# Altium PCB project_8.PcbDoc
Units mm, origin at the board's own origin, x right, y up, seen from the top; angles counter-clockwise.
Board outline 27.56 x 37.34 mm, 2 copper layers (Top Layer, Bottom Layer); 29 components, 48 nets, 125 pads, 32 vias.
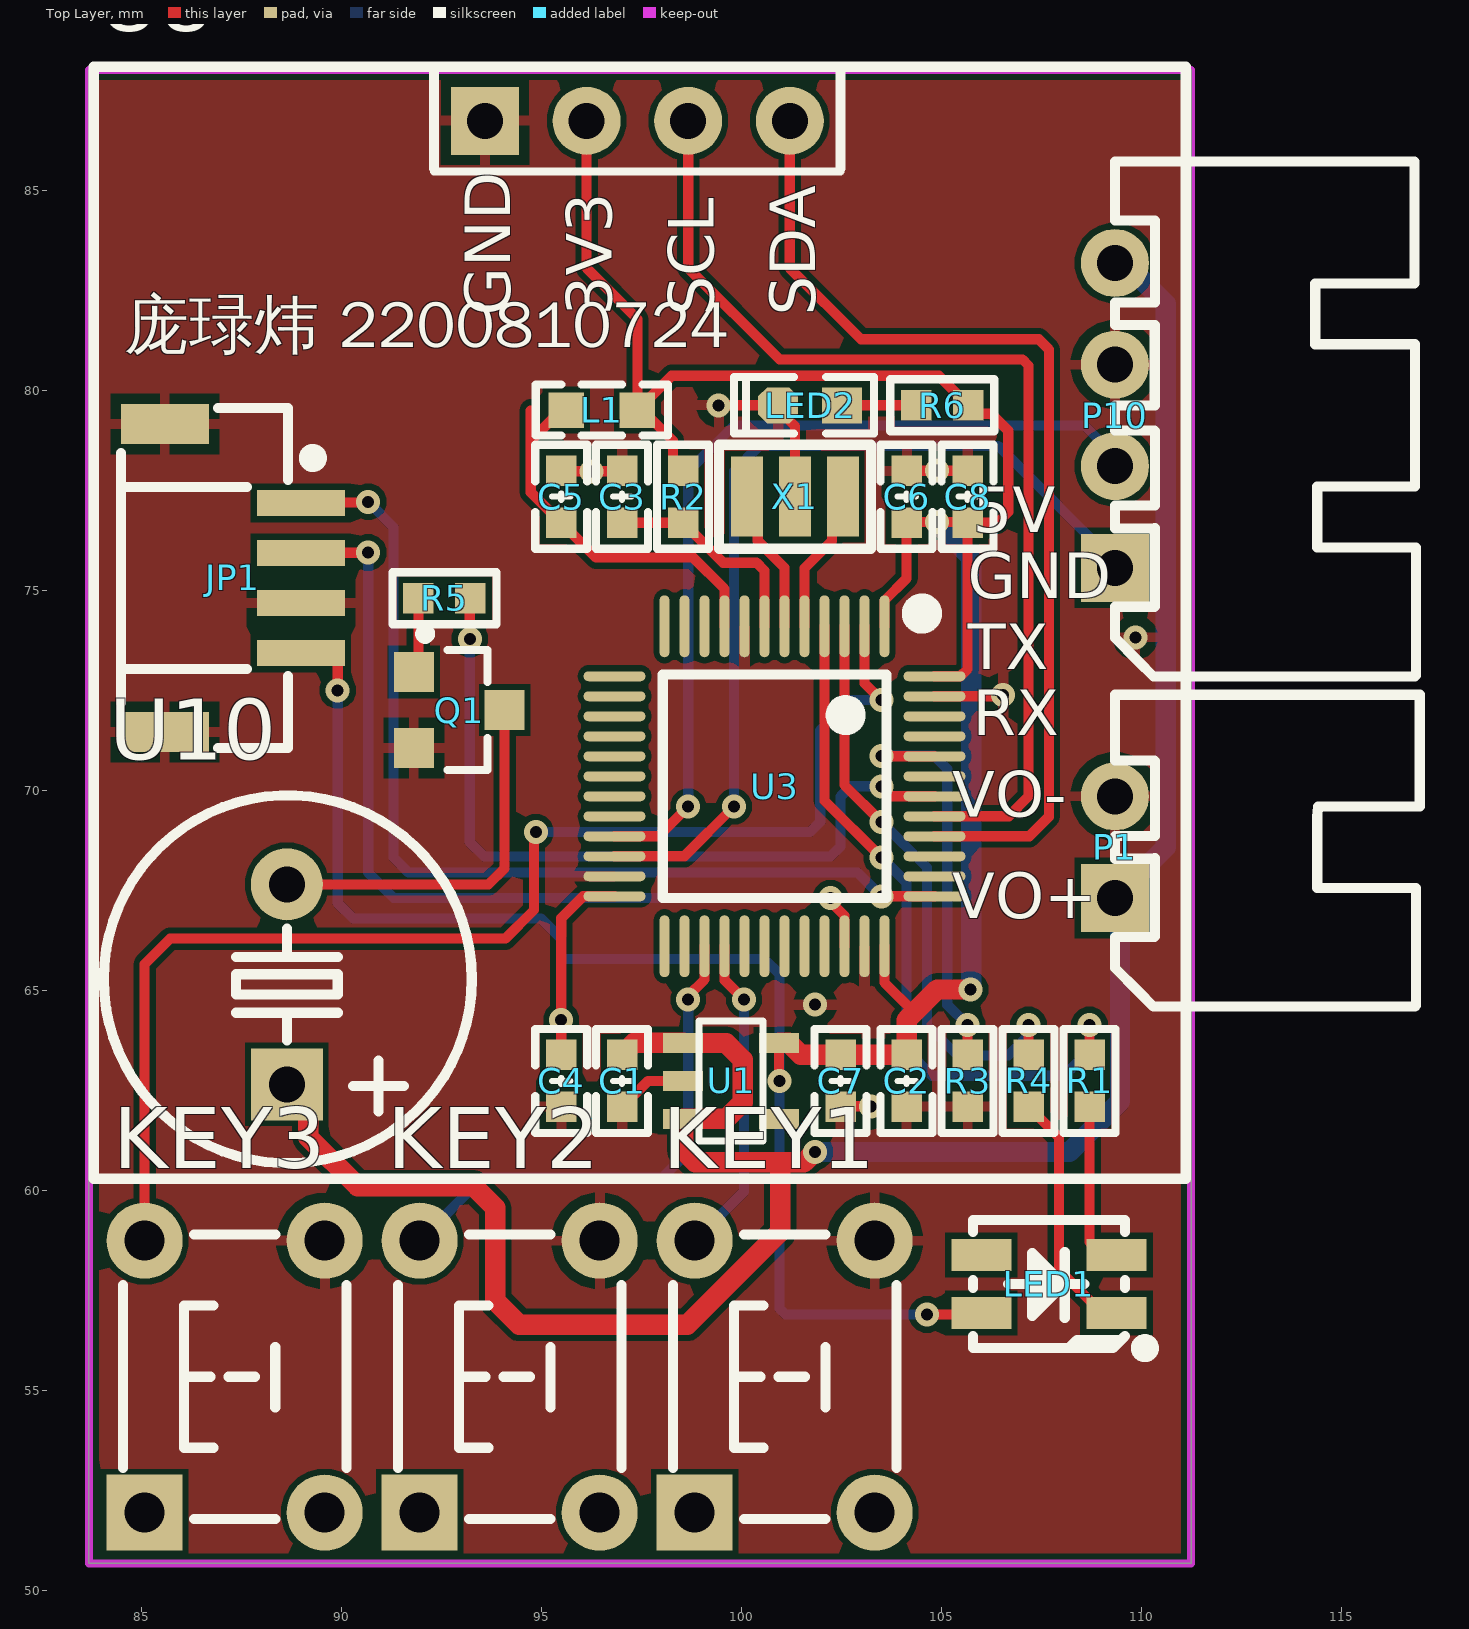
[diagram p0: Top Layer view]
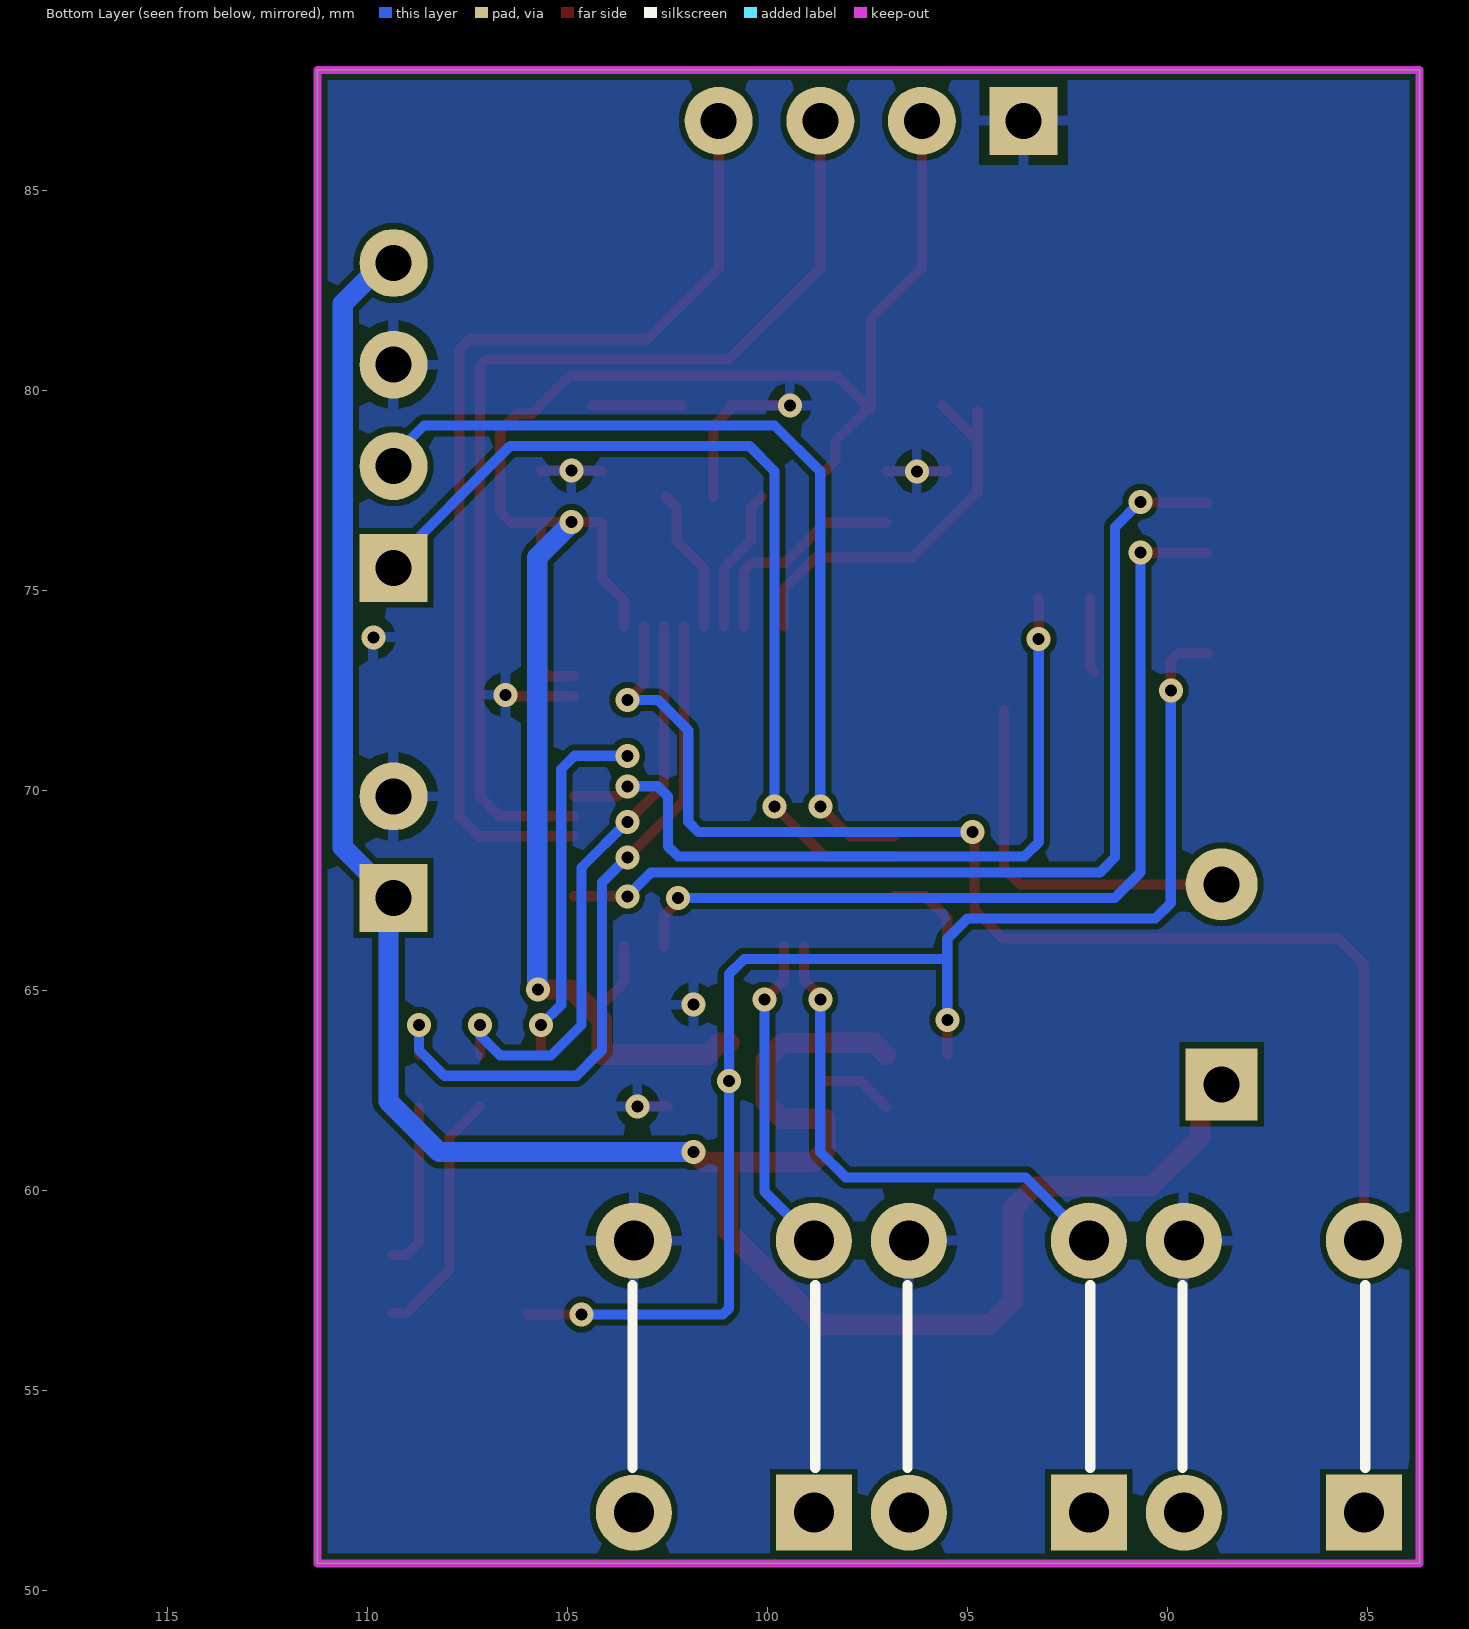
[diagram p1: Bottom Layer view, seen from below]

## Layer stack, top to bottom
Top Solder: solder mask 0.0102, Solder Resist, Dk 3.5
Top Layer: signal copper 0.0356
Dielectric 1: dielectric 0.32, FR-4, Dk 4.8
Bottom Layer: signal copper 0.0356
Bottom Solder: solder mask 0.0102, Solder Resist, Dk 3.5

## Board outline
83.693,50.673 83.693,88.011 111.252,88.011 111.252,50.673

## Design rules (kind name [scope] priority, off if disabled: settings)
Clearance [All] p1: gap=0.152 ignorepadtopadclearanceinfootprint=TRUE
ComponentClearance [All] p1: gap=0.1 collisioncheckmode=3 verticalgap=0 showdistances=FALSE
PolygonConnect [All] p1: connectstyle=Relief reliefconductorwidth=0.254 reliefentries=4 polygonreliefangle="90 Angle" airgapwidth=0.254
RoutingVias [All] p1: holewidth=0.711 width=1.27 viastyle="Through Hole" minholewidth=0.711 minwidth=1.27 maxholewidth=0.711 maxwidth=1.27
SolderMaskExpansion [All] p1: expansion=0.102 istentingtop=FALSE
SupplyNets "Schematic Supply Nets_3" [InNet('5V')] p1: voltage=0.000
SupplyNets "Schematic Supply Nets_2" [InNet('3V3VDDA')] p2: voltage=0.000
SupplyNets "Schematic Supply Nets_1" [InNet('VSS')] p3: voltage=0.000
SupplyNets "Schematic Supply Nets" [InNet('3V3')] p4: voltage=0.000
Width [All] p1: maxlimit=0.508 minlimit=0.254 preferedwidth=0.508 minimp=50.000000 maximp=50.000000 favimp=50.000000
29 further rules are at their usual default settings.

## Components (designator, comment, footprint, x,y, rotation, side; value= is the part's Value field where it differs from the comment)
C1 "1uF" "C 0603_L" 97.028,62.738 r270 top
C2 "100nF" "C 0603_L" 104.14,62.738 r270 top
C3 "100nF/50V" "C 0603_L" 97.028,77.343 r90 top
C4 "100nF/50V" "C 0603_L" 95.504,62.738 r90 top
C5 "100nF/50V" "C 0603_L" 95.504,77.343 r270 top
C6 "100nF/50V" "C 0603_L" 104.14,77.343 r270 top
C7 "100nF/50V" "C 0603_L" 102.489,62.738 r90 top
C8 "100nF/50V" "C 0603_L" 105.664,77.343 r270 top
JP1 "HDR-1X4" "GH 1.25-WS-4P" 86.995,75.311 r270 top
KEY1 "mod_buttom" MOD_BUTTOM 101.092,55.089 r90 top
KEY2 "mod_buttom" MOD_BUTTOM 94.216,55.089 r90 top
KEY3 "mod_buttom" MOD_BUTTOM 87.34,55.089 r90 top
L1 "0Ω" "L 0603" 96.52,79.51 r0 top
LED1 "RGB" "LED 3528-RGB" 107.696,57.658 r180 top
LED2 "Colour" "LED 0603R" 101.727,79.629 r180 top
P1 "port_mot_2p" XH2.54_2P 112.522,68.707 r270 top
P10 "port_uart_4p" XH2.54_4P 113.284,79.248 r270 top
Q1 "SS8050" SOT23-3L 92.964,72.009 r270 top
R1 "1K" "R 0603_L" 108.712,62.738 r270 top
R2 "10k" "R 0603_L" 98.552,77.343 r90 top
R3 "10k" "R 0603_L" 105.664,62.738 r270 top
R4 "1K" "R 0603_L" 107.188,62.738 r270 top
R5 "1K" "R 0603_L" 92.583,74.803 r180 top
R6 "1K" "R 0603_L" 105.029,79.629 r0 top
U1 "RT9013-33GB" SOT23-5 98.552,63.688 r270 top
U3 "STM32F103C8T6" "LQFP48 7X7_L" 100.838,70.104 r180 top locked
U8 "mod_oled" MOD_OLED 97.534,86.694 r0 top
U10 "mod_buzzer" MOD_BUZZER 88.773,65.278 r270 top
X1 "8M" "OSC 3213-3P" 101.346,77.343 r0 top

## Footprints (in the part's own frame and the unit in brackets; to place one, negate y for a bottom-side part, rotate by r counter-clockwise, add the part's x,y. Pads: shape width x height; smd on the part's side, far side on the other; paste and mask are expansions set on the pad)
"C 0603_L" [mil] "无极性贴片电容"
  rect 30x30 smd: 1(-25.59,0) 2(25.59,0)
  silkscreen extent -51,-26 51,26, body extent -31,-16 31,16, height 32
"GH 1.25-WS-4P" [mm] "长：8.25mm，宽：4.8mm，高：4.35mm"
  rect 1x2.2 smd: 0(-3.85,-1.4) 100(3.85,-1.4)
  rect 0.65x2.2 smd: 1(-1.875,2) 2(-0.625,2) 3(0.625,2) 4(1.875,2)
  silkscreen extent -4.25,-2.5 4.25,2.4, body extent -4.13,-2.5 4.12,2.35, height 4.35
"L 0603" [mil] "小功率贴片电感"
  rect 35x35 smd: 1(-35,0) 2(35,0)
  silkscreen extent -65,-25 65,25, body extent -31,-16 31,16, height 31
"LED 0603R" [mm] "红色0603LED"
  rect 1x0.9 smd: 1(-0.8,0)
  oct 1x0.9 smd: 2(0.8,0)
  silkscreen extent -1.6,-0.7 1.9,0.7, body extent -0.8,-0.4 0.8,0.4, height 0.47
"LED 3528-RGB" [mm] "4脚，3528LED"
  rect 1.5x0.8 smd: 1(1.689,0.725) 2(1.689,-0.725) 3(-1.689,-0.725) 4(-1.689,0.725)
  silkscreen extent -2.5,-1.6 1.9,1.7, body extent -1.75,-1.4 1.75,1.4, height 1.9
"LQFP48 7X7_L" [mm] "48脚，体宽7x7mm，脚距0.5mm"
  oval 0.25x1.55 smd: 1(-2.75,-4) 2(-2.25,-4) 3(-1.75,-4) 4(-1.25,-4) 5(-0.75,-4) 6(-0.25,-4) 7(0.25,-4) 8(0.75,-4) 9(1.25,-4) 10(1.75,-4) 11(2.25,-4) 12(2.75,-4) 25(2.75,4) 26(2.25,4) 27(1.75,4) 28(1.25,4) 29(0.75,4) 30(0.25,4) 31(-0.25,4) 32(-0.75,4) 33(-1.25,4) 34(-1.75,4) 35(-2.25,4) 36(-2.75,4)
  oval 1.55x0.25 smd: 13(4,-2.75) 14(4,-2.25) 15(4,-1.75) 16(4,-1.25) 17(4,-0.75) 18(4,-0.25) 19(4,0.25) 20(4,0.75) 21(4,1.25) 22(4,1.75) 23(4,2.25) 24(4,2.75) 37(-4,2.75) 38(-4,2.25) 39(-4,1.75) 40(-4,1.25) 41(-4,0.75) 42(-4,0.25) 43(-4,-0.25) 44(-4,-0.75) 45(-4,-1.25) 46(-4,-1.75) 47(-4,-2.25) 48(-4,-2.75)
  silkscreen extent -3.93,-4.57 2.79,2.79, body extent -4.5,-4.5 4.5,4.5, height 1.45
MOD_BUTTOM [mm]
  rect 1.9x1.9 hole 1: 1(-3.146,2.25)
  round 1.9 hole 1: 2(-3.146,-2.25) 3(3.654,-2.25) 4(3.654,2.25)
  silkscreen extent -3.3,-2.79 3.81,2.79, body extent -3.85,-3 4.36,3, height 4.25
MOD_BUZZER [mm] "有源蜂鸣器"
  rect 1.8x1.8 hole 0.9: 1(2.627,-0.127)
  round 1.8 hole 0.9: 2(-2.373,-0.127)
  silkscreen extent -4.6,-4.7 4.6,4.5, body extent -4.37,-4.63 4.63,4.37, height 5.45
MOD_OLED [mm] "外购屏幕模块接口"
  rect 1.7x1.7 hole 0.9: 1(-3.935,0.047)
  round 1.7 hole 0.9: 2(-1.395,0.047) 3(1.145,0.047) 4(3.685,0.047)
  silkscreen extent -13.72,-26.4 13.58,1.4, body extent -13.72,-26.42 13.59,1.4, height 8.5
"OSC 3213-3P" [mm] "内置电容晶振"
  rect 0.8x2 smd: 1(-1.2,0) 2(1.2,0) 3(0,0)
  silkscreen extent -1.9,-1.3 1.9,1.3, body extent -1.6,-0.65 1.6,0.65, height 1.02
"R 0603_L" [mil] "1/10W贴片电阻"
  rect 30x30 smd: 1(-25.59,0) 2(25.59,0)
  silkscreen extent -51,-26 51,26, body extent -31,-16 32,16, height 16
SOT23-3L [mm] "3x1.3x1mm(长宽高)"
  rect 1x1 smd: 1(-0.95,-1.143) 2(0.95,-1.143) 3(0,1.125)
  silkscreen extent -2.03,-0.99 1.5,0.7, body extent -1.5,-1.2 1.5,1.2, height 1.05
SOT23-5 [mm]
  rect 0.5x1 smd: 1(0,0) 2(0.95,0) 3(1.9,0) 4(1.9,2.4) 5(0,2.4)
  silkscreen extent -0.55,0.4 2.45,2, body extent -0.5,-0.2 2.4,2.6, height 1.09
XH2.54_2P [mm]
  rect 1.7x1.7 hole 0.9: 1(1.397,-3.175)
  round 1.7 hole 0.9: 2(-1.143,-3.175)
  silkscreen extent -3.68,-3.18 4.11,4.44, body extent -3.64,-3.52 3.9,4.17, height 5.73
XH2.54_4P [mm]
  rect 1.7x1.7 hole 0.9: 1(3.683,-3.937)
  round 1.7 hole 0.9: 2(1.143,-3.937) 3(-1.397,-3.937) 4(-3.937,-3.937)
  silkscreen extent -6.48,-3.94 6.4,3.59, body extent -6.44,-4.29 6.18,3.41, height 5.73

## Part data
C1 C2: library part C, "无极性贴片电容", BOM名称=无极性贴片电容, 学习资源=www.ooocke.com, 版权归属=源创客
C3 C4 C5 C6 C7 C8: library part 无极贴片电容, "贴片电容"
JP1: library part "Header 4", "4P接插件", BOM名称=4P接插件, 学习资源=www.ooocke.com, 版权归属=源创客
KEY1 KEY2 KEY3: "6*6*4.3按键"
L1: library part 磁珠, "小功率贴片电感"
LED1: library part LED-RGB-A, "共阳三基色LED", BOM名称=三基色LED, 学习资源=www.ooocke.com, 版权归属=源创客
LED2: library part LED-SMD, "贴片LED", BOM名称=贴片LED, 学习资源=www.ooocke.com, 版权归属=源创客
P1: "开环直流电机接口 / XH2.54弯排针2p"
P10: "串口接口/SPP蓝牙模块 / XH2.54弯排针4p/4p排母"
Q1: library part 8050-SMD, "高频放大-NPN型", BOM名称=高频放大-NPN型, 学习资源=www.ooocke.com, 属性="40V 1.5A 1W 100MHZ", 版权归属=源创客
R1 R4 R5 R6: library part R, "贴片电阻", BOM名称=贴片电阻, 学习资源=www.ooocke.com, 版权归属=源创客
R2 R3: library part 电阻, "贴片电阻1%精度"
U1: library part RT9193-33GB
U3: "STM32F103C8T6是一款由意法半导体公司（ST）推出的基于Cortex-M3内核的32位微控制器，硬件采用LQFP48封装，属于ST公司微控制器中的STM32系列。"
U8: "oled模块 / 4p排母"
U10: "有源蜂鸣器"
X1: library part XTAL-3P, "3脚内置电容无源晶振"

## Via types
v1: diameter 0.6, hole 0.3, Top Layer to Bottom Layer, 32 vias

## Nets (pads, with @x,y where several pads share a name; then routed paths per layer and width w, separated by ;. In a path a pad name is that pad's centre, name@x,y a point inside that pad or via, vN(x,y) a via of type N, cw(c..) or ccw(c..) an arc to the next point about the centre after c; other vN are vias at no path point)
3V3: C2.1 C4.2 C6.2 C7.2 C8.2 JP1.4 L1.2 LED1.1 R2.2 R6.2 U1.5 U3.1 U3.24 U3.36 U3.48 U8.2 | length 92
  Top Layer w0.254: JP1.4 89.718,73.436 89.916,73.238 v1(89.916,72.502) ; C4.2 95.504,66.802 96.056,67.354 U3.24 ; U8.2@96.141,86.534 96.139,86.532 96.139,83.058 97.409,81.788 L1.2 L1.2@97.469,79.569 ; R2.2 98.298,78.247 98.298,78.74 L1.2@97.469,79.569 ; U1.5 100.952,62.751 v1(100.965,62.738) ; U3.36 103.588,65.195 104.331,64.453 ; U3.1 103.588,74.75 104.14,75.302 C6.2 104.155,76.708 v1(104.902,76.708) C8.2@105.664,76.708 ; v1(104.648,56.896) 105.97,56.896 LED1.1 ; U3.48 105.484,72.854 105.664,73.034 C8.2 106.411,76.693 106.68,76.962 106.68,78.994 106.258,79.416 105.892,79.416 R6.2 104.942,80.366 98.265,80.366 L1.2@97.469,79.569
  Top Layer w0.508: U1.5 101.194,63.688 101.494,63.388 C7.2 C2.1 104.14,64.262 104.331,64.453 104.902,65.024 v1(105.735,65.024)
  Bottom Layer w0.254: v1(89.916,72.502) 89.916,67.183 90.297,66.802 94.996,66.802 95.504,66.294 95.504,65.786 ; v1(95.504,64.262) 95.504,65.786 ; v1(104.648,56.896) 101.114,56.896 100.965,57.045 v1(100.965,62.738) 100.965,65.405 100.584,65.786 95.504,65.786
  Bottom Layer w0.508: v1(104.902,76.708) 104.902,76.683 105.753,75.832 105.753,65.042 v1(105.735,65.024)
3V3VDDA: C5.2 L1.1 U3.9 | length 10.1
  Top Layer w0.254: 94.742,79.502 94.742,78.74 ; L1.1@95.631,79.629 94.742,78.74 ; U3.9 99.586,74.106 99.586,75.039 98.806,75.819 96.378,75.819 C5.2 94.742,77.455 94.742,78.74
5V: C1.1 P1.1 P10.4 U1.1 U1.3 U10.1 | length 60.1
  Top Layer w0.508: U10.1 89.184,62.113 89.184,61.327 90.412,60.099 93.317,60.099 93.853,59.563 93.853,57.244 94.455,56.642 98.659,56.642 100.981,58.964 100.981,60.706 ; C1.1 97.328,63.688 U1.1 98.556,63.684 99.631,63.684 100.046,63.27 100.046,62.206 99.631,61.792 98.556,61.792 U1.3 98.552,61.004 98.85,60.706 100.981,60.706 ; v1(101.854,60.96) 101.829,60.96 101.575,60.706 100.981,60.706
  Bottom Layer w0.508: v1(101.854,60.96) 108.204,60.96 109.474,62.23 109.474,67.183 P1.1 110.617,68.58 110.617,82.169 109.601,83.185 P10.4
BOOT0: R3.1 U3.44 | length 10.5
  Top Layer w0.254: v1(103.505,70.866) 103.515,70.856 104.836,70.856 U3.44 ; R3.1 v1(105.664,64.135)
  Bottom Layer w0.254: v1(103.505,70.866) 104.826,70.866 105.156,70.536 105.156,64.643 v1(105.664,64.135)
NetLED1_3: LED1.3 R1.2 | length 4.2
  Top Layer w0.254: R1.2 108.712,58.706 109.035,58.383 LED1.3
NetLED1_4: LED1.4 R4.2 | length 6.3
  Top Layer w0.254: R4.2 107.95,61.326 107.95,58.018 109.035,56.933 LED1.4
NetLED2_1: LED2.1 R6.1 | length 2.2
  Top Layer w0.254: LED2.1@102.146,79.629 R6.1
NetQ1_1: Q1.1 R5.2 | length 1.9
  Top Layer w0.254: Q1.1 91.933,73.071 R5.2
NetQ1_3: Q1.3 U10.2 | length 9.6
  Top Layer w0.254: U10.2 93.686,67.651 94.089,68.054 Q1.3
NRST: C3.1 R2.1 U3.7 | length 5.4
  Top Layer w0.254: C3.1 R2.1 99.553,75.692 100.39,75.692 100.588,75.494 U3.7
OSC_IN: U3.5 X1.2 | length 3.6
  Top Layer w0.254: U3.5 101.588,75.553 102.273,76.238 102.273,77.07 X1.2
OSC_OUT: U3.6 X1.1 | length 3.6
  Top Layer w0.254: X1.1 100.419,77.07 100.419,76.238 101.088,75.569 U3.6
PA0: U3.10
PA1: U3.11
PA2: U3.12
PA3: U3.13
PA4: U3.14
PA5: U3.15
PA6: U3.16
PA7: U3.17
PA8: U3.29
PA9: U3.30
PA10: U3.31
PA11: U3.32
PA12: U3.33
PA13: JP1.2 U3.34 | length 22.9
  Top Layer w0.254: JP1.2 89,75.941 90.673,75.941 v1(90.678,75.946) ; v1(102.236,67.313) 102.236,67.219 102.586,66.869 102.586,66.106 U3.34
  Bottom Layer w0.254: v1(90.678,75.946) 90.678,67.945 91.31,67.313 v1(102.236,67.313)
PA14: JP1.1 U3.37 | length 24.8
  Top Layer w0.254: JP1.1 89.01,77.201 90.663,77.201 v1(90.678,77.216) ; v1(103.505,67.354) U3.37
  Bottom Layer w0.254: v1(90.678,77.216) 91.313,76.581 91.313,68.326 91.694,67.945 102.914,67.945 v1(103.505,67.354)
PA15: U3.38
PB0: U3.18
PB1: U3.19
PB2: U3.20
PB3: U3.39
PB4: U3.40 U8.4 | length 25.5
  Top Layer w0.254: U8.4@101.221,86.534 101.219,86.532 101.219,83.058 102.997,81.28 107.442,81.28 107.696,81.026 107.696,69.342 107.208,68.854 U3.40
PB5: U3.41 U8.3 | length 26.3
  Top Layer w0.254: U8.3@98.681,86.534 98.679,86.532 98.679,83.058 100.965,80.772 107.039,80.772 107.188,80.623 107.188,69.85 106.692,69.354 U3.41
PB6: R5.1 U3.42 | length 19.4
  Top Layer w0.254: v1(93.218,73.787) 93.218,74.788 R5.1 ; v1(103.505,70.104) 103.755,69.854 U3.42
  Bottom Layer w0.254: v1(93.218,73.787) 93.218,68.707 93.574,68.351 102.235,68.351 102.489,68.605 102.489,69.85 102.743,70.104 v1(103.505,70.104)
PB7: U3.43
PB8: U3.45
PB9: U3.46
PB10: P10.2 U3.21 | length 22.3
  Top Layer w0.254: U3.21 97.937,68.854 v1(98.679,69.596)
  Bottom Layer w0.254: v1(98.679,69.596) 98.679,77.978 99.822,79.121 108.585,79.121 P10.2@109.601,78.105
PB11: P10.1 U3.22 | length 23.1
  Top Layer w0.254: U3.22 98.58,68.354 v1(99.822,69.596)
  Bottom Layer w0.254: v1(99.822,69.596) 99.822,77.978 100.457,78.613 106.426,78.613 P10.1@109.474,75.565
PB12: U3.25
PB13: U3.26
PB14: KEY2.4 U3.27 | length 12.9
  Top Layer w0.254: v1(98.679,64.77) 98.679,64.864 99.086,65.271 99.086,66.102 U3.27
  Bottom Layer w0.254: KEY2.4 93.548,60.325 98.044,60.325 98.679,60.96 v1(98.679,64.77)
PB15: KEY1.4 U3.28 | length 8.1
  Top Layer w0.254: U3.28 99.59,66.102 99.59,65.256 v1(100.076,64.77)
  Bottom Layer w0.254: KEY1.4 100.076,59.977 v1(100.076,64.77)
PC13: KEY3.4 U3.2 | length 32.5
  Top Layer w0.254: KEY3.4 85.09,65.659 85.725,66.294 94.107,66.294 94.823,67.01 94.823,68.915 v1(94.869,68.961) ; U3.2 103.088,72.68 v1(103.505,72.263)
  Bottom Layer w0.254: v1(94.869,68.961) 101.727,68.961 101.981,69.215 101.981,71.501 102.743,72.263 v1(103.505,72.263)
PC14: R4.1 U3.3 | length 14.9
  Top Layer w0.254: U3.3 102.588,70.132 v1(103.505,69.215) ; R4.1 v1(107.188,64.135)
  Bottom Layer w0.254: v1(103.505,69.215) 104.648,68.072 104.648,64.135 105.41,63.373 106.68,63.373 107.188,63.881 v1(107.188,64.135)
PC15: R1.1 U3.4 | length 17.9
  Top Layer w0.254: U3.4 102.088,69.743 v1(103.505,68.326) ; R1.1 v1(108.712,64.135)
  Bottom Layer w0.254: v1(103.505,68.326) 104.14,67.691 104.14,63.5 104.775,62.865 108.077,62.865 108.712,63.5 v1(108.712,64.135)
VSS: C1.2 C2.2 C3.2 C4.1 C5.1 C6.1 C7.1 C8.1 JP1.0 JP1.3 JP1.100 KEY1.3 KEY2.3 KEY3.3 LED2.2 P1.2 P10.3 Q1.2 R3.2 U1.2 U3.8 U3.23 U3.35 U3.47 U8.1 X1.3 | length 11.3
  Top Layer w0.254: C5.1 95.519,77.978 v1(96.266,77.978) 97.013,77.978 C3.2 ; C1.2 97.678,62.738 U1.2 ; v1(99.441,79.629) LED2.2 100.927,79.528 101.346,79.109 X1.3 ; C7.1 102.504,62.103 v1(103.251,62.103) ; C6.1 C8.1 ; U3.47 104.84,72.356 106.519,72.356 v1(106.553,72.39)
  other v1: 101.854,64.643 109.855,73.826 104.902,77.993
pads on no net: KEY1.1 KEY1.2 KEY2.1 KEY2.2 KEY3.1 KEY3.2 LED1.2 U1.4

## Polygon pours and split planes (outlines as drawn)
VSS on Top Layer "VSS_L01_P000" (solid, pour order 0): 83.693,50.673 83.693,88.011 111.252,88.011 111.252,50.673
VSS on Bottom Layer "VSS_L02_P001" (solid, pour order 1): 83.693,50.673 83.693,88.011 111.252,88.011 111.252,50.673

## Keep-outs
Keep-Out Layer:
  the board outline again, w0.2

## Silkscreen, mask and mechanical layers (free items; w line width, h text height)
Top Overlay:
  text "庞琭炜 2200810724" at 84.582,80.696 h2.03

## Text inside footprints (layer, text, board x,y; h text height)
P1: Top Overlay "VO+" at 105.283,66.802 h1.14; Top Overlay "VO-" at 105.283,69.342 h1.14
P10: Top Overlay "RX" at 105.791,71.374 h1.14; Top Overlay "TX" at 105.664,73.025 h1.14; Top Overlay "GND" at 105.664,74.803 h1.14; Top Overlay "5V" at 105.791,76.454 h1.14
U8: Top Overlay "3V3" at 96.772,81.868 h1.14 r90; Top Overlay "SCL" at 99.312,81.868 h1.14 r90; Top Overlay "SDA" at 101.852,81.868 h1.14 r90; Top Overlay "GND" at 94.232,81.868 h1.14 r90